# EAGLE board 13726_CSS811_BME280_Breakout_panel_V10 (EAGLE 7.5.0), part 1 of 5
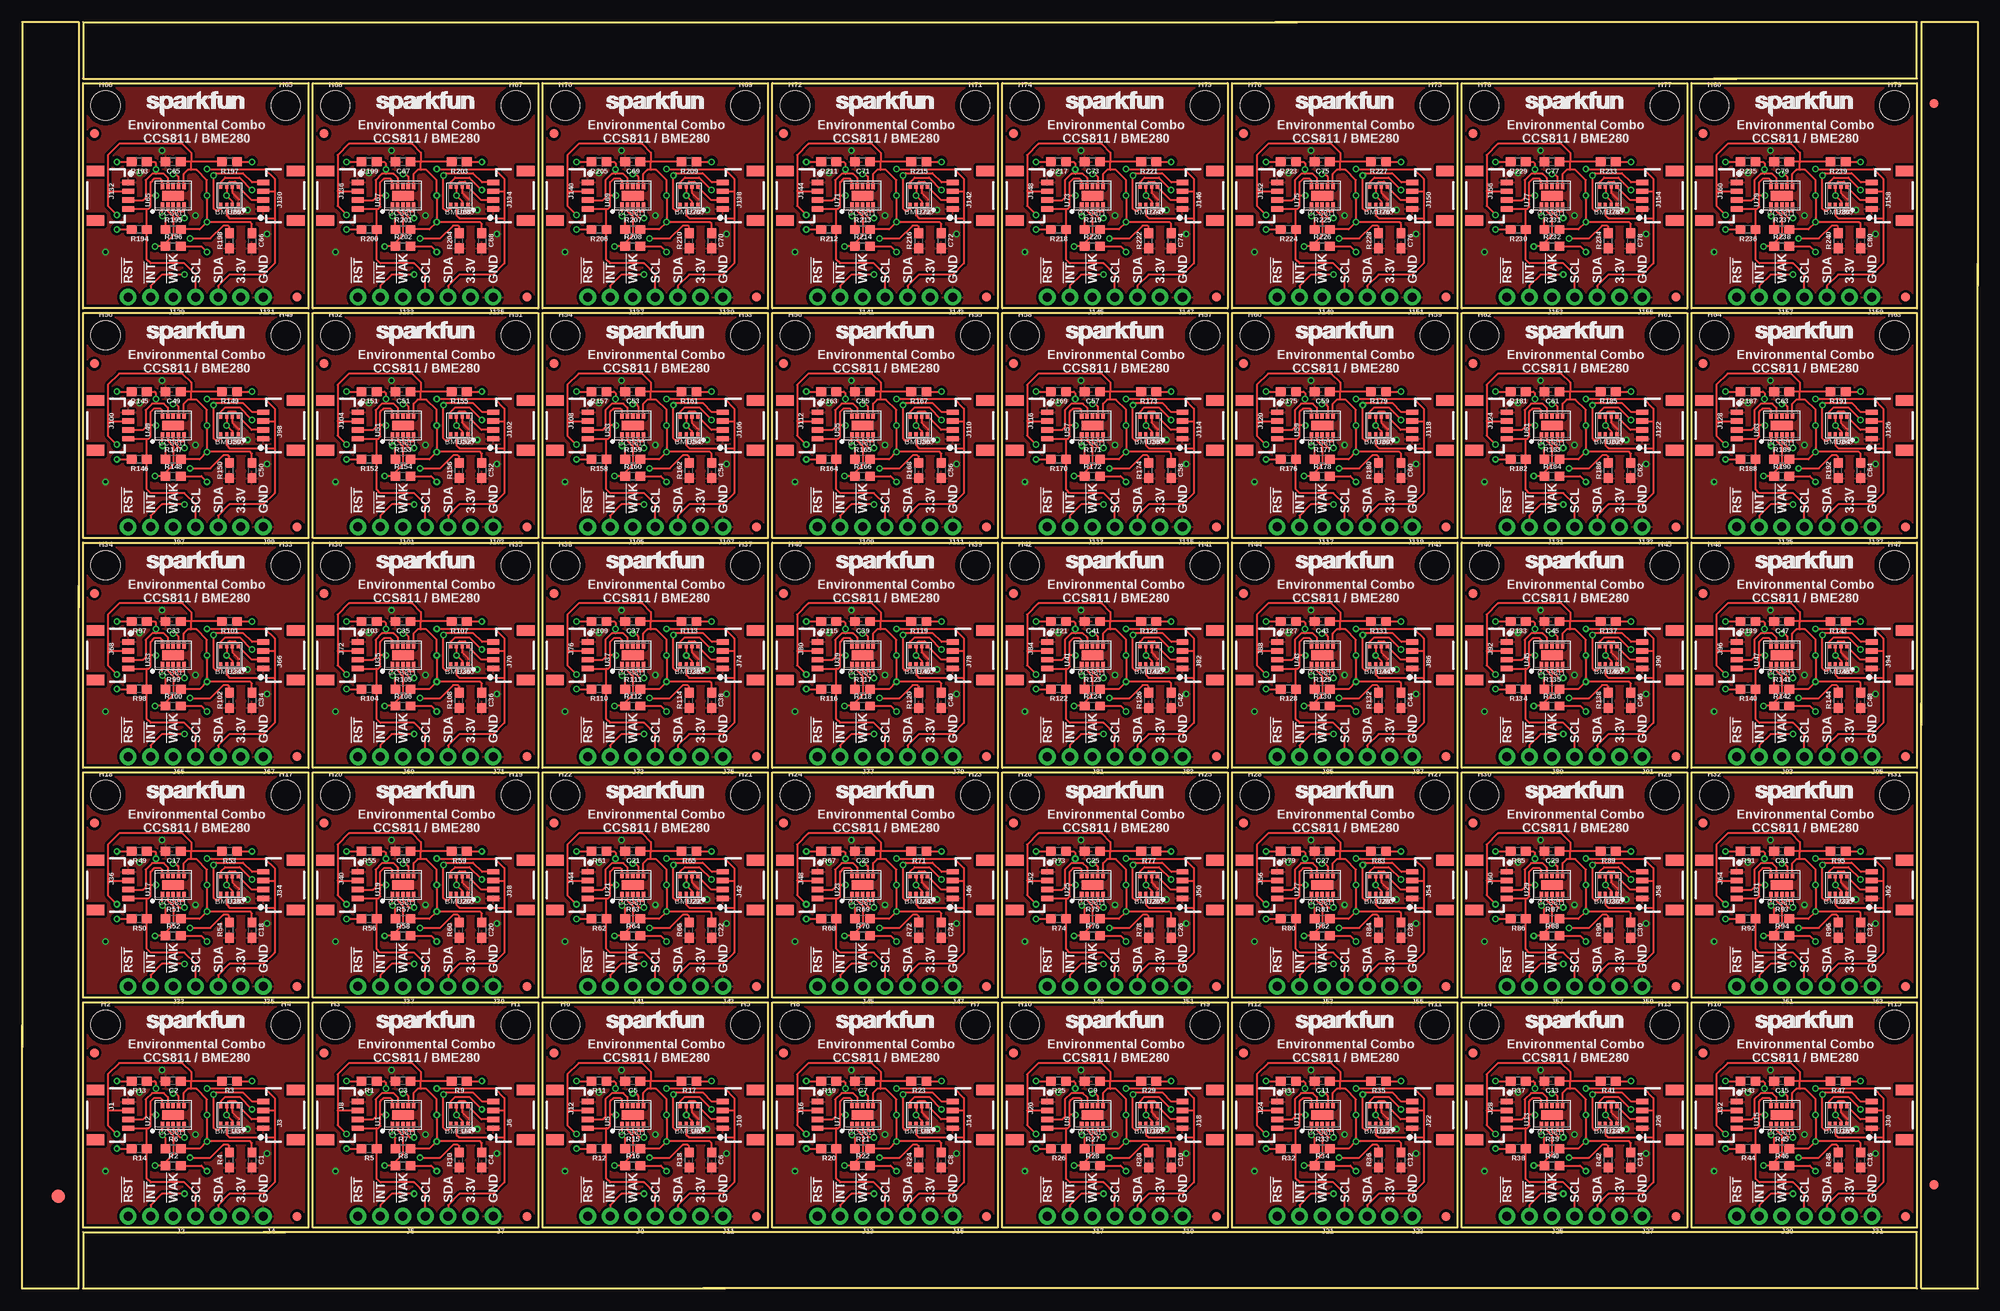
[diagram p0: board, top side]
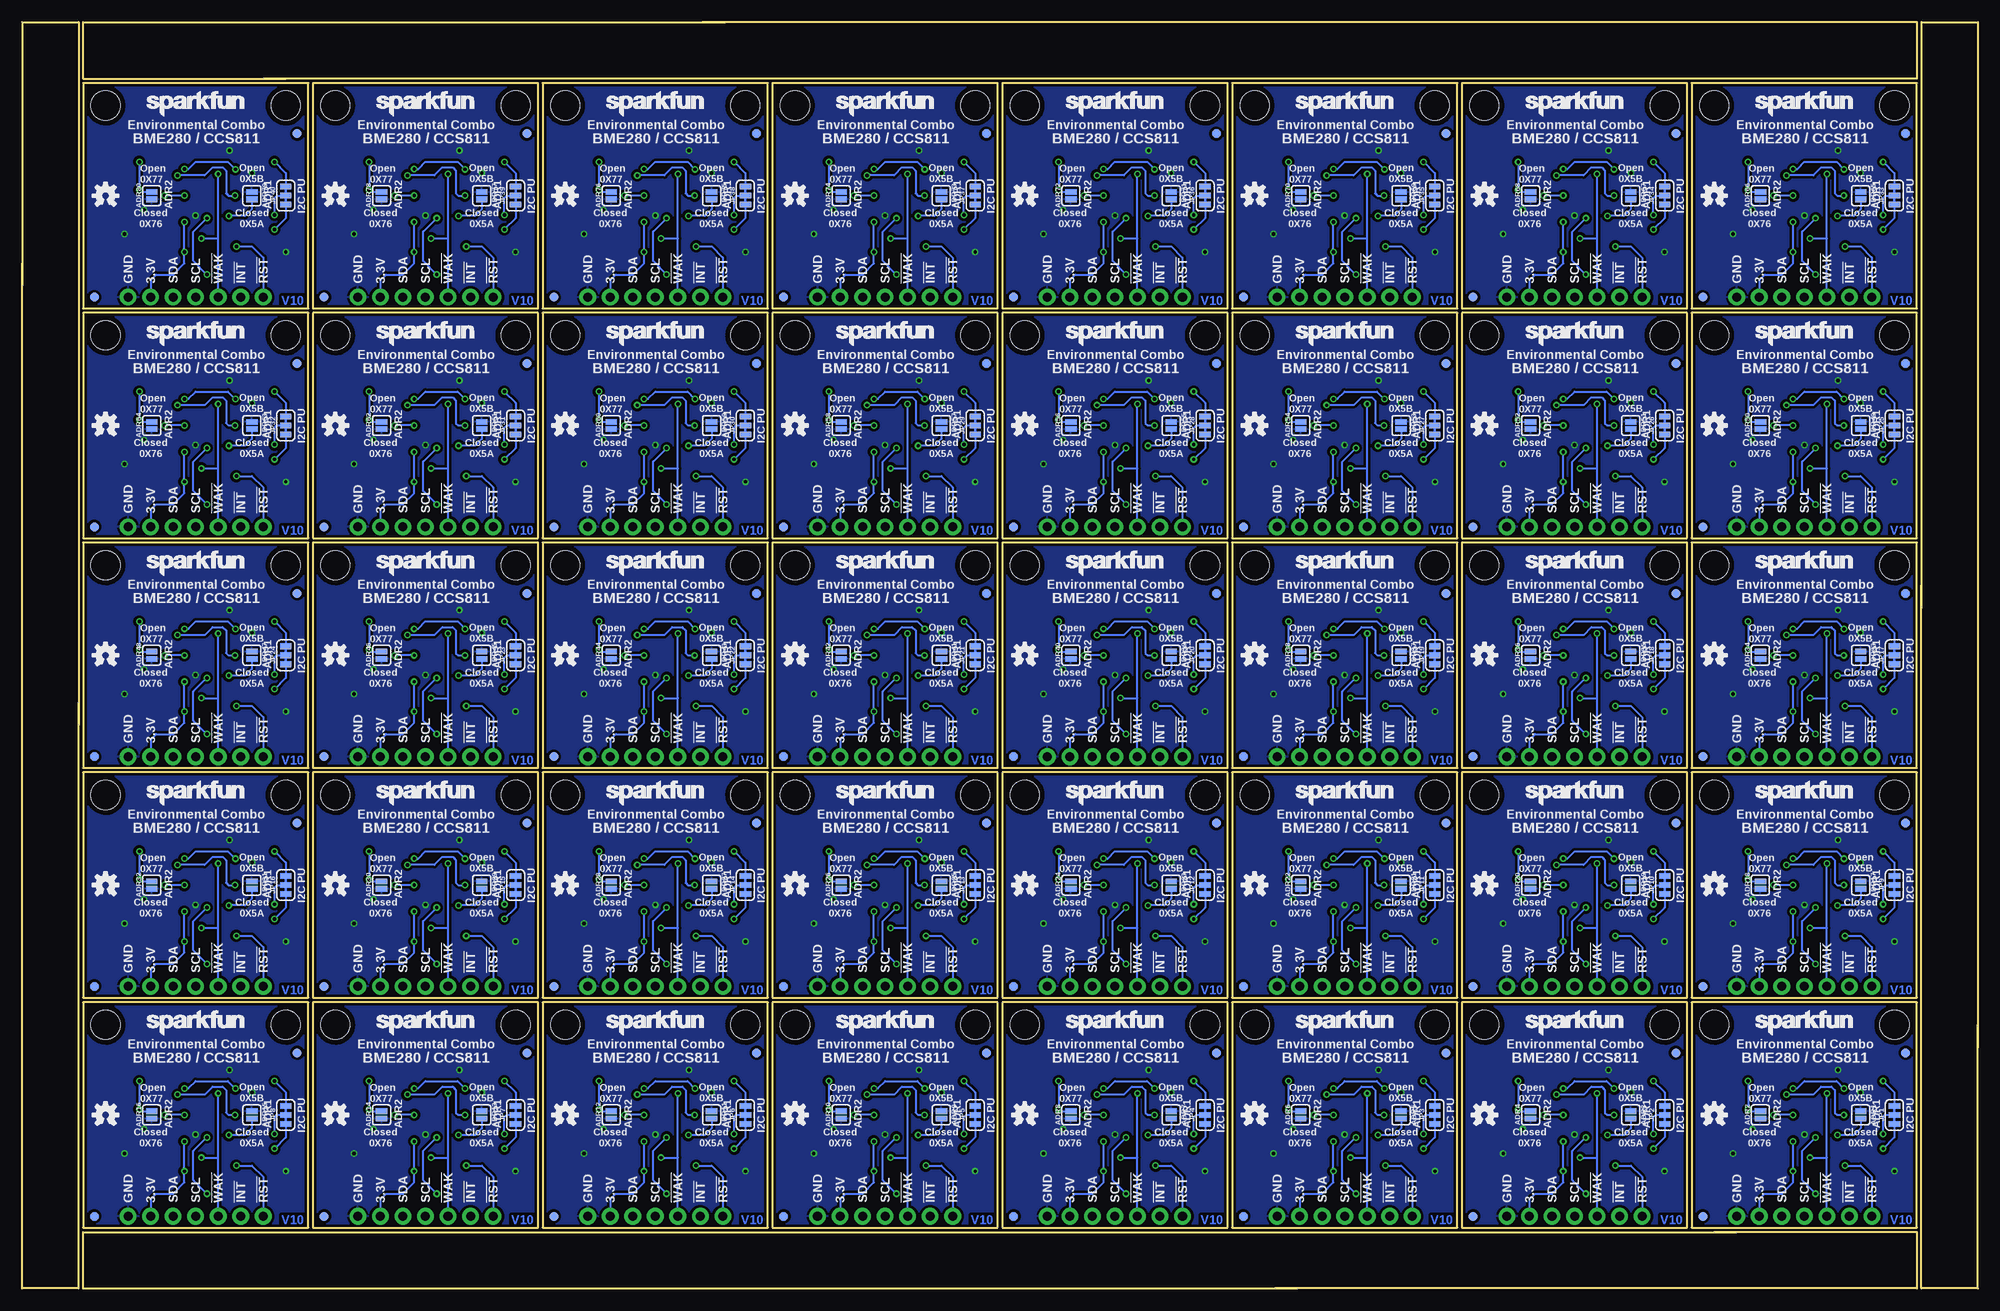
[diagram p1: board, bottom side, seen from below]

Size 220.47 x 142.75 mm. Coordinates in mm from the lower left corner, seen from the top.
Outline: 184 segments
Copper layers (1*16): Top 0.035mm / dielectric 1.5mm / Bottom 0.035mm
Design rules "SparkFun-2-layer-TIGHT": minimum track width 7mil, minimum drill 15mil, track to track 7mil, track to pad 7mil, pad to pad 7mil, via to via 7mil, smd to smd 7mil, copper to edge 7mil, drill to drill 7mil, minimum pad ring 7mil, minimum via ring 7mil, stop-mask expansion 4mil, vias tented up to drill 25mil, thermal gap 10mil

## Footprints (pad centres in the part's own frame; a part is rotated, then mirrored left to right if it is on the bottom)
SMT-JUMPER_2_NO_SILK = smd 0.635 x 1.27: 1 -0.406,0; 2 0.406,0
0603 = smd 1.1 x 1: 1 -0.85,0; 2 0.85,0
FIDUCIAL-1.5X3 = smd 1.5 x 1.5: 1 0,0
FIDUCIAL-1X2 = smd 1 x 1: 1 0,0
STAND-OFF = hole 3.302: 0,0
1X04_1MM_RA = smd 0.6 x 1.35: 1 -1.5,0; 2 -0.5,0; 3 0.5,0; 4 1.5,0 | smd 1.2 x 2: NC1 2.8,-3.675; NC2 -2.8,-3.675
1X03_NO_SILK = drill 1.016 pad 1.88: 1 0,0; 2 2.54,0; 3 5.08,0
1X04_NO_SILK = drill 1.016 pad 1.88: 1 0,0; 2 2.54,0; 3 5.08,0; 4 7.62,0
SMT-JUMPER_3_2-NC_TRACE_SILK = smd 0.635 x 1.27: 1 -1.016,0; 2 0,0; 3 1.016,0
LGA10 = smd 0.7 x 0.4: 1 -1.1,1.2; 2 -1.1,0.6; 3 -1.1,0; 4 -1.1,-0.6; 5 -1.1,-1.2; 6 1.1,-1.2; 7 1.1,-0.6; 8 1.1,0; 9 1.1,0.6; 10 1.1,1.2 | smd 1.1 x 2.45: EP 0,0
LGA-8-2.5X2.5 = smd 0.35 x 0.5: 1 -0.975,1.025; 2 -0.325,1.025; 3 0.325,1.025; 4 0.975,1.025; 5 0.975,-1.025; 6 0.325,-1.025; 7 -0.325,-1.025; 8 -0.975,-1.025

## Placement (x,y rotation side)
ADR1  [SMT-JUMPER_2_NO_SILK]  13.21,19.56 270 bottom
ADR2  [SMT-JUMPER_2_NO_SILK]  24.51,19.56 90 bottom
ADR3  [SMT-JUMPER_2_NO_SILK]  39.12,19.56 270 bottom
ADR4  [SMT-JUMPER_2_NO_SILK]  50.42,19.56 90 bottom
ADR5  [SMT-JUMPER_2_NO_SILK]  65.02,19.56 270 bottom
ADR6  [SMT-JUMPER_2_NO_SILK]  76.33,19.56 90 bottom
ADR7  [SMT-JUMPER_2_NO_SILK]  90.93,19.56 270 bottom
ADR8  [SMT-JUMPER_2_NO_SILK]  102.23,19.56 90 bottom
ADR9  [SMT-JUMPER_2_NO_SILK]  116.84,19.56 270 bottom
ADR10  [SMT-JUMPER_2_NO_SILK]  128.14,19.56 90 bottom
ADR11  [SMT-JUMPER_2_NO_SILK]  142.75,19.56 270 bottom
ADR12  [SMT-JUMPER_2_NO_SILK]  154.05,19.56 90 bottom
ADR13  [SMT-JUMPER_2_NO_SILK]  168.66,19.56 270 bottom
ADR14  [SMT-JUMPER_2_NO_SILK]  179.96,19.56 90 bottom
ADR15  [SMT-JUMPER_2_NO_SILK]  194.56,19.56 270 bottom
ADR16  [SMT-JUMPER_2_NO_SILK]  205.87,19.56 90 bottom
ADR17  [SMT-JUMPER_2_NO_SILK]  13.21,45.47 270 bottom
ADR18  [SMT-JUMPER_2_NO_SILK]  24.51,45.47 90 bottom
ADR19  [SMT-JUMPER_2_NO_SILK]  39.12,45.47 270 bottom
ADR20  [SMT-JUMPER_2_NO_SILK]  50.42,45.47 90 bottom
ADR21  [SMT-JUMPER_2_NO_SILK]  65.02,45.47 270 bottom
ADR22  [SMT-JUMPER_2_NO_SILK]  76.33,45.47 90 bottom
ADR23  [SMT-JUMPER_2_NO_SILK]  90.93,45.47 270 bottom
ADR24  [SMT-JUMPER_2_NO_SILK]  102.23,45.47 90 bottom
ADR25  [SMT-JUMPER_2_NO_SILK]  116.84,45.47 270 bottom
ADR26  [SMT-JUMPER_2_NO_SILK]  128.14,45.47 90 bottom
ADR27  [SMT-JUMPER_2_NO_SILK]  142.75,45.47 270 bottom
ADR28  [SMT-JUMPER_2_NO_SILK]  154.05,45.47 90 bottom
ADR29  [SMT-JUMPER_2_NO_SILK]  168.66,45.47 270 bottom
ADR30  [SMT-JUMPER_2_NO_SILK]  179.96,45.47 90 bottom
ADR31  [SMT-JUMPER_2_NO_SILK]  194.56,45.47 270 bottom
ADR32  [SMT-JUMPER_2_NO_SILK]  205.87,45.47 90 bottom
ADR33  [SMT-JUMPER_2_NO_SILK]  13.21,71.37 270 bottom
ADR34  [SMT-JUMPER_2_NO_SILK]  24.51,71.37 90 bottom
ADR35  [SMT-JUMPER_2_NO_SILK]  39.12,71.37 270 bottom
ADR36  [SMT-JUMPER_2_NO_SILK]  50.42,71.37 90 bottom
ADR37  [SMT-JUMPER_2_NO_SILK]  65.02,71.37 270 bottom
ADR38  [SMT-JUMPER_2_NO_SILK]  76.33,71.37 90 bottom
ADR39  [SMT-JUMPER_2_NO_SILK]  90.93,71.37 270 bottom
ADR40  [SMT-JUMPER_2_NO_SILK]  102.23,71.37 90 bottom
ADR41  [SMT-JUMPER_2_NO_SILK]  116.84,71.37 270 bottom
ADR42  [SMT-JUMPER_2_NO_SILK]  128.14,71.37 90 bottom
ADR43  [SMT-JUMPER_2_NO_SILK]  142.75,71.37 270 bottom
ADR44  [SMT-JUMPER_2_NO_SILK]  154.05,71.37 90 bottom
ADR45  [SMT-JUMPER_2_NO_SILK]  168.66,71.37 270 bottom
ADR46  [SMT-JUMPER_2_NO_SILK]  179.96,71.37 90 bottom
ADR47  [SMT-JUMPER_2_NO_SILK]  194.56,71.37 270 bottom
ADR48  [SMT-JUMPER_2_NO_SILK]  205.87,71.37 90 bottom
ADR49  [SMT-JUMPER_2_NO_SILK]  13.21,97.28 270 bottom
ADR50  [SMT-JUMPER_2_NO_SILK]  24.51,97.28 90 bottom
ADR51  [SMT-JUMPER_2_NO_SILK]  39.12,97.28 270 bottom
ADR52  [SMT-JUMPER_2_NO_SILK]  50.42,97.28 90 bottom
ADR53  [SMT-JUMPER_2_NO_SILK]  65.02,97.28 270 bottom
ADR54  [SMT-JUMPER_2_NO_SILK]  76.33,97.28 90 bottom
ADR55  [SMT-JUMPER_2_NO_SILK]  90.93,97.28 270 bottom
ADR56  [SMT-JUMPER_2_NO_SILK]  102.23,97.28 90 bottom
ADR57  [SMT-JUMPER_2_NO_SILK]  116.84,97.28 270 bottom
ADR58  [SMT-JUMPER_2_NO_SILK]  128.14,97.28 90 bottom
ADR59  [SMT-JUMPER_2_NO_SILK]  142.75,97.28 270 bottom
ADR60  [SMT-JUMPER_2_NO_SILK]  154.05,97.28 90 bottom
ADR61  [SMT-JUMPER_2_NO_SILK]  168.66,97.28 270 bottom
ADR62  [SMT-JUMPER_2_NO_SILK]  179.96,97.28 90 bottom
ADR63  [SMT-JUMPER_2_NO_SILK]  194.56,97.28 270 bottom
ADR64  [SMT-JUMPER_2_NO_SILK]  205.87,97.28 90 bottom
ADR65  [SMT-JUMPER_2_NO_SILK]  13.21,123.19 270 bottom
ADR66  [SMT-JUMPER_2_NO_SILK]  24.51,123.19 90 bottom
ADR67  [SMT-JUMPER_2_NO_SILK]  39.12,123.19 270 bottom
ADR68  [SMT-JUMPER_2_NO_SILK]  50.42,123.19 90 bottom
ADR69  [SMT-JUMPER_2_NO_SILK]  65.02,123.19 270 bottom
ADR70  [SMT-JUMPER_2_NO_SILK]  76.33,123.19 90 bottom
ADR71  [SMT-JUMPER_2_NO_SILK]  90.93,123.19 270 bottom
ADR72  [SMT-JUMPER_2_NO_SILK]  102.23,123.19 90 bottom
ADR73  [SMT-JUMPER_2_NO_SILK]  116.84,123.19 270 bottom
ADR74  [SMT-JUMPER_2_NO_SILK]  128.14,123.19 90 bottom
ADR75  [SMT-JUMPER_2_NO_SILK]  142.75,123.19 270 bottom
ADR76  [SMT-JUMPER_2_NO_SILK]  154.05,123.19 90 bottom
ADR77  [SMT-JUMPER_2_NO_SILK]  168.66,123.19 270 bottom
ADR78  [SMT-JUMPER_2_NO_SILK]  179.96,123.19 90 bottom
ADR79  [SMT-JUMPER_2_NO_SILK]  194.56,123.19 270 bottom
ADR80  [SMT-JUMPER_2_NO_SILK]  205.87,123.19 90 bottom
C1  0.1uF  [0603]  25.91,14.48 270 top
C2  1.0uF  [0603]  17.02,23.37 180 top
C3  1.0uF  [0603]  42.93,23.37 180 top
C4  0.1uF  [0603]  51.82,14.48 270 top
C5  1.0uF  [0603]  68.83,23.37 180 top
C6  0.1uF  [0603]  77.72,14.48 270 top
C7  1.0uF  [0603]  94.74,23.37 180 top
C8  0.1uF  [0603]  103.63,14.48 270 top
C9  1.0uF  [0603]  120.65,23.37 180 top
C10  0.1uF  [0603]  129.54,14.48 270 top
C11  1.0uF  [0603]  146.56,23.37 180 top
C12  0.1uF  [0603]  155.45,14.48 270 top
C13  1.0uF  [0603]  172.47,23.37 180 top
C14  0.1uF  [0603]  181.36,14.48 270 top
C15  1.0uF  [0603]  198.37,23.37 180 top
C16  0.1uF  [0603]  207.26,14.48 270 top
C17  1.0uF  [0603]  17.02,49.28 180 top
C18  0.1uF  [0603]  25.91,40.39 270 top
C19  1.0uF  [0603]  42.93,49.28 180 top
C20  0.1uF  [0603]  51.82,40.39 270 top
C21  1.0uF  [0603]  68.83,49.28 180 top
C22  0.1uF  [0603]  77.72,40.39 270 top
C23  1.0uF  [0603]  94.74,49.28 180 top
C24  0.1uF  [0603]  103.63,40.39 270 top
C25  1.0uF  [0603]  120.65,49.28 180 top
C26  0.1uF  [0603]  129.54,40.39 270 top
C27  1.0uF  [0603]  146.56,49.28 180 top
C28  0.1uF  [0603]  155.45,40.39 270 top
C29  1.0uF  [0603]  172.47,49.28 180 top
C30  0.1uF  [0603]  181.36,40.39 270 top
C31  1.0uF  [0603]  198.37,49.28 180 top
C32  0.1uF  [0603]  207.26,40.39 270 top
C33  1.0uF  [0603]  17.02,75.18 180 top
C34  0.1uF  [0603]  25.91,66.29 270 top
C35  1.0uF  [0603]  42.93,75.18 180 top
C36  0.1uF  [0603]  51.82,66.29 270 top
C37  1.0uF  [0603]  68.83,75.18 180 top
C38  0.1uF  [0603]  77.72,66.29 270 top
C39  1.0uF  [0603]  94.74,75.18 180 top
C40  0.1uF  [0603]  103.63,66.29 270 top
C41  1.0uF  [0603]  120.65,75.18 180 top
C42  0.1uF  [0603]  129.54,66.29 270 top
C43  1.0uF  [0603]  146.56,75.18 180 top
C44  0.1uF  [0603]  155.45,66.29 270 top
C45  1.0uF  [0603]  172.47,75.18 180 top
C46  0.1uF  [0603]  181.36,66.29 270 top
C47  1.0uF  [0603]  198.37,75.18 180 top
C48  0.1uF  [0603]  207.26,66.29 270 top
C49  1.0uF  [0603]  17.02,101.09 180 top
C50  0.1uF  [0603]  25.91,92.2 270 top
C51  1.0uF  [0603]  42.93,101.09 180 top
C52  0.1uF  [0603]  51.82,92.2 270 top
C53  1.0uF  [0603]  68.83,101.09 180 top
C54  0.1uF  [0603]  77.72,92.2 270 top
C55  1.0uF  [0603]  94.74,101.09 180 top
C56  0.1uF  [0603]  103.63,92.2 270 top
C57  1.0uF  [0603]  120.65,101.09 180 top
C58  0.1uF  [0603]  129.54,92.2 270 top
C59  1.0uF  [0603]  146.56,101.09 180 top
C60  0.1uF  [0603]  155.45,92.2 270 top
C61  1.0uF  [0603]  172.47,101.09 180 top
C62  0.1uF  [0603]  181.36,92.2 270 top
C63  1.0uF  [0603]  198.37,101.09 180 top
C64  0.1uF  [0603]  207.26,92.2 270 top
C65  1.0uF  [0603]  17.02,127 180 top
C66  0.1uF  [0603]  25.91,118.11 270 top
C67  1.0uF  [0603]  42.93,127 180 top
C68  0.1uF  [0603]  51.82,118.11 270 top
C69  1.0uF  [0603]  68.83,127 180 top
C70  0.1uF  [0603]  77.72,118.11 270 top
C71  1.0uF  [0603]  94.74,127 180 top
C72  0.1uF  [0603]  103.63,118.11 270 top
C73  1.0uF  [0603]  120.65,127 180 top
C74  0.1uF  [0603]  129.54,118.11 270 top
C75  1.0uF  [0603]  146.56,127 180 top
C76  0.1uF  [0603]  155.45,118.11 270 top
C77  1.0uF  [0603]  172.47,127 180 top
C78  0.1uF  [0603]  181.36,118.11 270 top
C79  1.0uF  [0603]  198.37,127 180 top
C80  0.1uF  [0603]  207.26,118.11 270 top
E$1  [FIDUCIAL-1.5X3]  4.06,10.41 0 top
E$7  [FIDUCIAL-1X2]  215.52,133.6 180 top
E$8  [FIDUCIAL-1X2]  215.52,11.68 0 top
FD1  FIDUCIAL1X2  [FIDUCIAL-1X2]  8.13,26.54 0 top
FD2  FIDUCIAL1X2  [FIDUCIAL-1X2]  30.99,8.13 0 top
FD3  FIDUCIAL1X2  [FIDUCIAL-1X2]  30.99,8.13 0 bottom
FD4  FIDUCIAL1X2  [FIDUCIAL-1X2]  8.13,26.54 0 bottom
FD5  FIDUCIAL1X2  [FIDUCIAL-1X2]  34.04,26.54 0 top
FD6  FIDUCIAL1X2  [FIDUCIAL-1X2]  56.9,8.13 0 top
FD7  FIDUCIAL1X2  [FIDUCIAL-1X2]  56.9,8.13 0 bottom
FD8  FIDUCIAL1X2  [FIDUCIAL-1X2]  34.04,26.54 0 bottom
FD9  FIDUCIAL1X2  [FIDUCIAL-1X2]  59.94,26.54 0 top
FD10  FIDUCIAL1X2  [FIDUCIAL-1X2]  82.8,8.13 0 top
FD11  FIDUCIAL1X2  [FIDUCIAL-1X2]  82.8,8.13 0 bottom
FD12  FIDUCIAL1X2  [FIDUCIAL-1X2]  59.94,26.54 0 bottom
FD13  FIDUCIAL1X2  [FIDUCIAL-1X2]  85.85,26.54 0 top
FD14  FIDUCIAL1X2  [FIDUCIAL-1X2]  108.71,8.13 0 top
FD15  FIDUCIAL1X2  [FIDUCIAL-1X2]  108.71,8.13 0 bottom
FD16  FIDUCIAL1X2  [FIDUCIAL-1X2]  85.85,26.54 0 bottom
FD17  FIDUCIAL1X2  [FIDUCIAL-1X2]  111.76,26.54 0 top
FD18  FIDUCIAL1X2  [FIDUCIAL-1X2]  134.62,8.13 0 top
FD19  FIDUCIAL1X2  [FIDUCIAL-1X2]  134.62,8.13 0 bottom
FD20  FIDUCIAL1X2  [FIDUCIAL-1X2]  111.76,26.54 0 bottom
FD21  FIDUCIAL1X2  [FIDUCIAL-1X2]  137.67,26.54 0 top
FD22  FIDUCIAL1X2  [FIDUCIAL-1X2]  160.53,8.13 0 top
FD23  FIDUCIAL1X2  [FIDUCIAL-1X2]  160.53,8.13 0 bottom
FD24  FIDUCIAL1X2  [FIDUCIAL-1X2]  137.67,26.54 0 bottom
FD25  FIDUCIAL1X2  [FIDUCIAL-1X2]  163.58,26.54 0 top
FD26  FIDUCIAL1X2  [FIDUCIAL-1X2]  186.44,8.13 0 top
FD27  FIDUCIAL1X2  [FIDUCIAL-1X2]  186.44,8.13 0 bottom
FD28  FIDUCIAL1X2  [FIDUCIAL-1X2]  163.58,26.54 0 bottom
FD29  FIDUCIAL1X2  [FIDUCIAL-1X2]  189.48,26.54 0 top
FD30  FIDUCIAL1X2  [FIDUCIAL-1X2]  212.34,8.13 0 top
FD31  FIDUCIAL1X2  [FIDUCIAL-1X2]  212.34,8.13 0 bottom
FD32  FIDUCIAL1X2  [FIDUCIAL-1X2]  189.48,26.54 0 bottom
FD33  FIDUCIAL1X2  [FIDUCIAL-1X2]  8.13,52.45 0 top
FD34  FIDUCIAL1X2  [FIDUCIAL-1X2]  30.99,34.04 0 top
FD35  FIDUCIAL1X2  [FIDUCIAL-1X2]  30.99,34.04 0 bottom
FD36  FIDUCIAL1X2  [FIDUCIAL-1X2]  8.13,52.45 0 bottom
FD37  FIDUCIAL1X2  [FIDUCIAL-1X2]  34.04,52.45 0 top
FD38  FIDUCIAL1X2  [FIDUCIAL-1X2]  56.9,34.04 0 top
FD39  FIDUCIAL1X2  [FIDUCIAL-1X2]  56.9,34.04 0 bottom
FD40  FIDUCIAL1X2  [FIDUCIAL-1X2]  34.04,52.45 0 bottom
FD41  FIDUCIAL1X2  [FIDUCIAL-1X2]  59.94,52.45 0 top
FD42  FIDUCIAL1X2  [FIDUCIAL-1X2]  82.8,34.04 0 top
FD43  FIDUCIAL1X2  [FIDUCIAL-1X2]  82.8,34.04 0 bottom
FD44  FIDUCIAL1X2  [FIDUCIAL-1X2]  59.94,52.45 0 bottom
FD45  FIDUCIAL1X2  [FIDUCIAL-1X2]  85.85,52.45 0 top
FD46  FIDUCIAL1X2  [FIDUCIAL-1X2]  108.71,34.04 0 top
FD47  FIDUCIAL1X2  [FIDUCIAL-1X2]  108.71,34.04 0 bottom
FD48  FIDUCIAL1X2  [FIDUCIAL-1X2]  85.85,52.45 0 bottom
FD49  FIDUCIAL1X2  [FIDUCIAL-1X2]  111.76,52.45 0 top
FD50  FIDUCIAL1X2  [FIDUCIAL-1X2]  134.62,34.04 0 top
FD51  FIDUCIAL1X2  [FIDUCIAL-1X2]  134.62,34.04 0 bottom
FD52  FIDUCIAL1X2  [FIDUCIAL-1X2]  111.76,52.45 0 bottom
FD53  FIDUCIAL1X2  [FIDUCIAL-1X2]  137.67,52.45 0 top
FD54  FIDUCIAL1X2  [FIDUCIAL-1X2]  160.53,34.04 0 top
FD55  FIDUCIAL1X2  [FIDUCIAL-1X2]  160.53,34.04 0 bottom
FD56  FIDUCIAL1X2  [FIDUCIAL-1X2]  137.67,52.45 0 bottom
FD57  FIDUCIAL1X2  [FIDUCIAL-1X2]  163.58,52.45 0 top
FD58  FIDUCIAL1X2  [FIDUCIAL-1X2]  186.44,34.04 0 top
FD59  FIDUCIAL1X2  [FIDUCIAL-1X2]  186.44,34.04 0 bottom
FD60  FIDUCIAL1X2  [FIDUCIAL-1X2]  163.58,52.45 0 bottom
FD61  FIDUCIAL1X2  [FIDUCIAL-1X2]  189.48,52.45 0 top
FD62  FIDUCIAL1X2  [FIDUCIAL-1X2]  212.34,34.04 0 top
FD63  FIDUCIAL1X2  [FIDUCIAL-1X2]  212.34,34.04 0 bottom
FD64  FIDUCIAL1X2  [FIDUCIAL-1X2]  189.48,52.45 0 bottom
FD65  FIDUCIAL1X2  [FIDUCIAL-1X2]  8.13,78.36 0 top
FD66  FIDUCIAL1X2  [FIDUCIAL-1X2]  30.99,59.94 0 top
FD67  FIDUCIAL1X2  [FIDUCIAL-1X2]  30.99,59.94 0 bottom
FD68  FIDUCIAL1X2  [FIDUCIAL-1X2]  8.13,78.36 0 bottom
FD69  FIDUCIAL1X2  [FIDUCIAL-1X2]  34.04,78.36 0 top
FD70  FIDUCIAL1X2  [FIDUCIAL-1X2]  56.9,59.94 0 top
FD71  FIDUCIAL1X2  [FIDUCIAL-1X2]  56.9,59.94 0 bottom
FD72  FIDUCIAL1X2  [FIDUCIAL-1X2]  34.04,78.36 0 bottom
FD73  FIDUCIAL1X2  [FIDUCIAL-1X2]  59.94,78.36 0 top
FD74  FIDUCIAL1X2  [FIDUCIAL-1X2]  82.8,59.94 0 top
FD75  FIDUCIAL1X2  [FIDUCIAL-1X2]  82.8,59.94 0 bottom
FD76  FIDUCIAL1X2  [FIDUCIAL-1X2]  59.94,78.36 0 bottom
FD77  FIDUCIAL1X2  [FIDUCIAL-1X2]  85.85,78.36 0 top
FD78  FIDUCIAL1X2  [FIDUCIAL-1X2]  108.71,59.94 0 top
FD79  FIDUCIAL1X2  [FIDUCIAL-1X2]  108.71,59.94 0 bottom
FD80  FIDUCIAL1X2  [FIDUCIAL-1X2]  85.85,78.36 0 bottom
FD81  FIDUCIAL1X2  [FIDUCIAL-1X2]  111.76,78.36 0 top
FD82  FIDUCIAL1X2  [FIDUCIAL-1X2]  134.62,59.94 0 top
FD83  FIDUCIAL1X2  [FIDUCIAL-1X2]  134.62,59.94 0 bottom
FD84  FIDUCIAL1X2  [FIDUCIAL-1X2]  111.76,78.36 0 bottom
FD85  FIDUCIAL1X2  [FIDUCIAL-1X2]  137.67,78.36 0 top
FD86  FIDUCIAL1X2  [FIDUCIAL-1X2]  160.53,59.94 0 top
FD87  FIDUCIAL1X2  [FIDUCIAL-1X2]  160.53,59.94 0 bottom
FD88  FIDUCIAL1X2  [FIDUCIAL-1X2]  137.67,78.36 0 bottom
FD89  FIDUCIAL1X2  [FIDUCIAL-1X2]  163.58,78.36 0 top
FD90  FIDUCIAL1X2  [FIDUCIAL-1X2]  186.44,59.94 0 top
FD91  FIDUCIAL1X2  [FIDUCIAL-1X2]  186.44,59.94 0 bottom
FD92  FIDUCIAL1X2  [FIDUCIAL-1X2]  163.58,78.36 0 bottom
FD93  FIDUCIAL1X2  [FIDUCIAL-1X2]  189.48,78.36 0 top
FD94  FIDUCIAL1X2  [FIDUCIAL-1X2]  212.34,59.94 0 top
FD95  FIDUCIAL1X2  [FIDUCIAL-1X2]  212.34,59.94 0 bottom
FD96  FIDUCIAL1X2  [FIDUCIAL-1X2]  189.48,78.36 0 bottom
FD97  FIDUCIAL1X2  [FIDUCIAL-1X2]  8.13,104.27 0 top
FD98  FIDUCIAL1X2  [FIDUCIAL-1X2]  30.99,85.85 0 top
FD99  FIDUCIAL1X2  [FIDUCIAL-1X2]  30.99,85.85 0 bottom
FD100  FIDUCIAL1X2  [FIDUCIAL-1X2]  8.13,104.27 0 bottom
FD101  FIDUCIAL1X2  [FIDUCIAL-1X2]  34.04,104.27 0 top
FD102  FIDUCIAL1X2  [FIDUCIAL-1X2]  56.9,85.85 0 top
FD103  FIDUCIAL1X2  [FIDUCIAL-1X2]  56.9,85.85 0 bottom
FD104  FIDUCIAL1X2  [FIDUCIAL-1X2]  34.04,104.27 0 bottom
FD105  FIDUCIAL1X2  [FIDUCIAL-1X2]  59.94,104.27 0 top
FD106  FIDUCIAL1X2  [FIDUCIAL-1X2]  82.8,85.85 0 top
FD107  FIDUCIAL1X2  [FIDUCIAL-1X2]  82.8,85.85 0 bottom
FD108  FIDUCIAL1X2  [FIDUCIAL-1X2]  59.94,104.27 0 bottom
FD109  FIDUCIAL1X2  [FIDUCIAL-1X2]  85.85,104.27 0 top
FD110  FIDUCIAL1X2  [FIDUCIAL-1X2]  108.71,85.85 0 top
FD111  FIDUCIAL1X2  [FIDUCIAL-1X2]  108.71,85.85 0 bottom
FD112  FIDUCIAL1X2  [FIDUCIAL-1X2]  85.85,104.27 0 bottom
FD113  FIDUCIAL1X2  [FIDUCIAL-1X2]  111.76,104.27 0 top
FD114  FIDUCIAL1X2  [FIDUCIAL-1X2]  134.62,85.85 0 top
FD115  FIDUCIAL1X2  [FIDUCIAL-1X2]  134.62,85.85 0 bottom
FD116  FIDUCIAL1X2  [FIDUCIAL-1X2]  111.76,104.27 0 bottom
FD117  FIDUCIAL1X2  [FIDUCIAL-1X2]  137.67,104.27 0 top
FD118  FIDUCIAL1X2  [FIDUCIAL-1X2]  160.53,85.85 0 top
FD119  FIDUCIAL1X2  [FIDUCIAL-1X2]  160.53,85.85 0 bottom
FD120  FIDUCIAL1X2  [FIDUCIAL-1X2]  137.67,104.27 0 bottom
FD121  FIDUCIAL1X2  [FIDUCIAL-1X2]  163.58,104.27 0 top
FD122  FIDUCIAL1X2  [FIDUCIAL-1X2]  186.44,85.85 0 top
FD123  FIDUCIAL1X2  [FIDUCIAL-1X2]  186.44,85.85 0 bottom
FD124  FIDUCIAL1X2  [FIDUCIAL-1X2]  163.58,104.27 0 bottom
FD125  FIDUCIAL1X2  [FIDUCIAL-1X2]  189.48,104.27 0 top
FD126  FIDUCIAL1X2  [FIDUCIAL-1X2]  212.34,85.85 0 top
FD127  FIDUCIAL1X2  [FIDUCIAL-1X2]  212.34,85.85 0 bottom
FD128  FIDUCIAL1X2  [FIDUCIAL-1X2]  189.48,104.27 0 bottom
FD129  FIDUCIAL1X2  [FIDUCIAL-1X2]  8.13,130.18 0 top
FD130  FIDUCIAL1X2  [FIDUCIAL-1X2]  30.99,111.76 0 top
FD131  FIDUCIAL1X2  [FIDUCIAL-1X2]  30.99,111.76 0 bottom
FD132  FIDUCIAL1X2  [FIDUCIAL-1X2]  8.13,130.18 0 bottom
FD133  FIDUCIAL1X2  [FIDUCIAL-1X2]  34.04,130.18 0 top
FD134  FIDUCIAL1X2  [FIDUCIAL-1X2]  56.9,111.76 0 top
FD135  FIDUCIAL1X2  [FIDUCIAL-1X2]  56.9,111.76 0 bottom
FD136  FIDUCIAL1X2  [FIDUCIAL-1X2]  34.04,130.18 0 bottom
FD137  FIDUCIAL1X2  [FIDUCIAL-1X2]  59.94,130.18 0 top
FD138  FIDUCIAL1X2  [FIDUCIAL-1X2]  82.8,111.76 0 top
FD139  FIDUCIAL1X2  [FIDUCIAL-1X2]  82.8,111.76 0 bottom
FD140  FIDUCIAL1X2  [FIDUCIAL-1X2]  59.94,130.18 0 bottom
FD141  FIDUCIAL1X2  [FIDUCIAL-1X2]  85.85,130.18 0 top
FD142  FIDUCIAL1X2  [FIDUCIAL-1X2]  108.71,111.76 0 top
FD143  FIDUCIAL1X2  [FIDUCIAL-1X2]  108.71,111.76 0 bottom
FD144  FIDUCIAL1X2  [FIDUCIAL-1X2]  85.85,130.18 0 bottom
FD145  FIDUCIAL1X2  [FIDUCIAL-1X2]  111.76,130.18 0 top
FD146  FIDUCIAL1X2  [FIDUCIAL-1X2]  134.62,111.76 0 top
FD147  FIDUCIAL1X2  [FIDUCIAL-1X2]  134.62,111.76 0 bottom
FD148  FIDUCIAL1X2  [FIDUCIAL-1X2]  111.76,130.18 0 bottom
FD149  FIDUCIAL1X2  [FIDUCIAL-1X2]  137.67,130.18 0 top
FD150  FIDUCIAL1X2  [FIDUCIAL-1X2]  160.53,111.76 0 top
FD151  FIDUCIAL1X2  [FIDUCIAL-1X2]  160.53,111.76 0 bottom
FD152  FIDUCIAL1X2  [FIDUCIAL-1X2]  137.67,130.18 0 bottom
FD153  FIDUCIAL1X2  [FIDUCIAL-1X2]  163.58,130.18 0 top
FD154  FIDUCIAL1X2  [FIDUCIAL-1X2]  186.44,111.76 0 top
FD155  FIDUCIAL1X2  [FIDUCIAL-1X2]  186.44,111.76 0 bottom
FD156  FIDUCIAL1X2  [FIDUCIAL-1X2]  163.58,130.18 0 bottom
FD157  FIDUCIAL1X2  [FIDUCIAL-1X2]  189.48,130.18 0 top
FD158  FIDUCIAL1X2  [FIDUCIAL-1X2]  212.34,111.76 0 top
FD159  FIDUCIAL1X2  [FIDUCIAL-1X2]  212.34,111.76 0 bottom
FD160  FIDUCIAL1X2  [FIDUCIAL-1X2]  189.48,130.18 0 bottom
H1  STAND-OFF  [STAND-OFF]  55.63,29.72 0 top
H2  STAND-OFF  [STAND-OFF]  9.4,29.72 0 top
H3  STAND-OFF  [STAND-OFF]  35.31,29.72 0 top
H4  STAND-OFF  [STAND-OFF]  29.72,29.72 0 top
H5  STAND-OFF  [STAND-OFF]  81.53,29.72 0 top
H6  STAND-OFF  [STAND-OFF]  61.21,29.72 0 top
H7  STAND-OFF  [STAND-OFF]  107.44,29.72 0 top
H8  STAND-OFF  [STAND-OFF]  87.12,29.72 0 top
H9  STAND-OFF  [STAND-OFF]  133.35,29.72 0 top
H10  STAND-OFF  [STAND-OFF]  113.03,29.72 0 top
H11  STAND-OFF  [STAND-OFF]  159.26,29.72 0 top
H12  STAND-OFF  [STAND-OFF]  138.94,29.72 0 top
H13  STAND-OFF  [STAND-OFF]  185.17,29.72 0 top
H14  STAND-OFF  [STAND-OFF]  164.85,29.72 0 top
H15  STAND-OFF  [STAND-OFF]  211.07,29.72 0 top
H16  STAND-OFF  [STAND-OFF]  190.75,29.72 0 top
H17  STAND-OFF  [STAND-OFF]  29.72,55.63 0 top
H18  STAND-OFF  [STAND-OFF]  9.4,55.63 0 top
H19  STAND-OFF  [STAND-OFF]  55.63,55.63 0 top
H20  STAND-OFF  [STAND-OFF]  35.31,55.63 0 top
H21  STAND-OFF  [STAND-OFF]  81.53,55.63 0 top
H22  STAND-OFF  [STAND-OFF]  61.21,55.63 0 top
H23  STAND-OFF  [STAND-OFF]  107.44,55.63 0 top
H24  STAND-OFF  [STAND-OFF]  87.12,55.63 0 top
H25  STAND-OFF  [STAND-OFF]  133.35,55.63 0 top
H26  STAND-OFF  [STAND-OFF]  113.03,55.63 0 top
H27  STAND-OFF  [STAND-OFF]  159.26,55.63 0 top
H28  STAND-OFF  [STAND-OFF]  138.94,55.63 0 top
H29  STAND-OFF  [STAND-OFF]  185.17,55.63 0 top
H30  STAND-OFF  [STAND-OFF]  164.85,55.63 0 top
H31  STAND-OFF  [STAND-OFF]  211.07,55.63 0 top
H32  STAND-OFF  [STAND-OFF]  190.75,55.63 0 top
H33  STAND-OFF  [STAND-OFF]  29.72,81.53 0 top
H34  STAND-OFF  [STAND-OFF]  9.4,81.53 0 top
H35  STAND-OFF  [STAND-OFF]  55.63,81.53 0 top
H36  STAND-OFF  [STAND-OFF]  35.31,81.53 0 top
H37  STAND-OFF  [STAND-OFF]  81.53,81.53 0 top
H38  STAND-OFF  [STAND-OFF]  61.21,81.53 0 top
H39  STAND-OFF  [STAND-OFF]  107.44,81.53 0 top
H40  STAND-OFF  [STAND-OFF]  87.12,81.53 0 top
H41  STAND-OFF  [STAND-OFF]  133.35,81.53 0 top
H42  STAND-OFF  [STAND-OFF]  113.03,81.53 0 top
H43  STAND-OFF  [STAND-OFF]  159.26,81.53 0 top
H44  STAND-OFF  [STAND-OFF]  138.94,81.53 0 top
H45  STAND-OFF  [STAND-OFF]  185.17,81.53 0 top
H46  STAND-OFF  [STAND-OFF]  164.85,81.53 0 top
H47  STAND-OFF  [STAND-OFF]  211.07,81.53 0 top
H48  STAND-OFF  [STAND-OFF]  190.75,81.53 0 top
H49  STAND-OFF  [STAND-OFF]  29.72,107.44 0 top
H50  STAND-OFF  [STAND-OFF]  9.4,107.44 0 top
H51  STAND-OFF  [STAND-OFF]  55.63,107.44 0 top
H52  STAND-OFF  [STAND-OFF]  35.31,107.44 0 top
H53  STAND-OFF  [STAND-OFF]  81.53,107.44 0 top
H54  STAND-OFF  [STAND-OFF]  61.21,107.44 0 top
H55  STAND-OFF  [STAND-OFF]  107.44,107.44 0 top
H56  STAND-OFF  [STAND-OFF]  87.12,107.44 0 top
H57  STAND-OFF  [STAND-OFF]  133.35,107.44 0 top
H58  STAND-OFF  [STAND-OFF]  113.03,107.44 0 top
H59  STAND-OFF  [STAND-OFF]  159.26,107.44 0 top
H60  STAND-OFF  [STAND-OFF]  138.94,107.44 0 top
H61  STAND-OFF  [STAND-OFF]  185.17,107.44 0 top
H62  STAND-OFF  [STAND-OFF]  164.85,107.44 0 top
H63  STAND-OFF  [STAND-OFF]  211.07,107.44 0 top
H64  STAND-OFF  [STAND-OFF]  190.75,107.44 0 top
H65  STAND-OFF  [STAND-OFF]  29.72,133.35 0 top
H66  STAND-OFF  [STAND-OFF]  9.4,133.35 0 top
H67  STAND-OFF  [STAND-OFF]  55.63,133.35 0 top
H68  STAND-OFF  [STAND-OFF]  35.31,133.35 0 top
H69  STAND-OFF  [STAND-OFF]  81.53,133.35 0 top
H70  STAND-OFF  [STAND-OFF]  61.21,133.35 0 top
H71  STAND-OFF  [STAND-OFF]  107.44,133.35 0 top
H72  STAND-OFF  [STAND-OFF]  87.12,133.35 0 top
H73  STAND-OFF  [STAND-OFF]  133.35,133.35 0 top
H74  STAND-OFF  [STAND-OFF]  113.03,133.35 0 top
H75  STAND-OFF  [STAND-OFF]  159.26,133.35 0 top
H76  STAND-OFF  [STAND-OFF]  138.94,133.35 0 top
H77  STAND-OFF  [STAND-OFF]  185.17,133.35 0 top
H78  STAND-OFF  [STAND-OFF]  164.85,133.35 0 top
H79  STAND-OFF  [STAND-OFF]  211.07,133.35 0 top
H80  STAND-OFF  [STAND-OFF]  190.75,133.35 0 top
J1  Qwiic Right Angle  [1X04_1MM_RA]  11.94,19.56 270 top
J2  CCS811 Options  [1X03_NO_SILK]  17.02,8.13 180 top
J3  Qwiic Right Angle  [1X04_1MM_RA]  27.18,19.56 90 top
J4  PTH  [1X04_NO_SILK]  27.18,8.13 180 top
J5  CCS811 Options  [1X03_NO_SILK]  42.93,8.13 180 top
J6  Qwiic Right Angle  [1X04_1MM_RA]  53.09,19.56 90 top
J7  PTH  [1X04_NO_SILK]  53.09,8.13 180 top
J8  Qwiic Right Angle  [1X04_1MM_RA]  37.85,19.56 270 top
J9  CCS811 Options  [1X03_NO_SILK]  68.83,8.13 180 top
J10  Qwiic Right Angle  [1X04_1MM_RA]  78.99,19.56 90 top
J11  PTH  [1X04_NO_SILK]  78.99,8.13 180 top
J12  Qwiic Right Angle  [1X04_1MM_RA]  63.75,19.56 270 top
J13  CCS811 Options  [1X03_NO_SILK]  94.74,8.13 180 top
J14  Qwiic Right Angle  [1X04_1MM_RA]  104.9,19.56 90 top
J15  PTH  [1X04_NO_SILK]  104.9,8.13 180 top
J16  Qwiic Right Angle  [1X04_1MM_RA]  89.66,19.56 270 top
J17  CCS811 Options  [1X03_NO_SILK]  120.65,8.13 180 top
J18  Qwiic Right Angle  [1X04_1MM_RA]  130.81,19.56 90 top
J19  PTH  [1X04_NO_SILK]  130.81,8.13 180 top
J20  Qwiic Right Angle  [1X04_1MM_RA]  115.57,19.56 270 top
J21  CCS811 Options  [1X03_NO_SILK]  146.56,8.13 180 top
J22  Qwiic Right Angle  [1X04_1MM_RA]  156.72,19.56 90 top
J23  PTH  [1X04_NO_SILK]  156.72,8.13 180 top
J24  Qwiic Right Angle  [1X04_1MM_RA]  141.48,19.56 270 top
J25  CCS811 Options  [1X03_NO_SILK]  172.47,8.13 180 top
J26  Qwiic Right Angle  [1X04_1MM_RA]  182.63,19.56 90 top
J27  PTH  [1X04_NO_SILK]  182.63,8.13 180 top
J28  Qwiic Right Angle  [1X04_1MM_RA]  167.39,19.56 270 top
J29  CCS811 Options  [1X03_NO_SILK]  198.37,8.13 180 top
J30  Qwiic Right Angle  [1X04_1MM_RA]  208.53,19.56 90 top
J31  PTH  [1X04_NO_SILK]  208.53,8.13 180 top
J32  Qwiic Right Angle  [1X04_1MM_RA]  193.29,19.56 270 top
J33  CCS811 Options  [1X03_NO_SILK]  17.02,34.04 180 top
J34  Qwiic Right Angle  [1X04_1MM_RA]  27.18,45.47 90 top
J35  PTH  [1X04_NO_SILK]  27.18,34.04 180 top
J36  Qwiic Right Angle  [1X04_1MM_RA]  11.94,45.47 270 top
J37  CCS811 Options  [1X03_NO_SILK]  42.93,34.04 180 top
J38  Qwiic Right Angle  [1X04_1MM_RA]  53.09,45.47 90 top
J39  PTH  [1X04_NO_SILK]  53.09,34.04 180 top
J40  Qwiic Right Angle  [1X04_1MM_RA]  37.85,45.47 270 top
J41  CCS811 Options  [1X03_NO_SILK]  68.83,34.04 180 top
J42  Qwiic Right Angle  [1X04_1MM_RA]  78.99,45.47 90 top
J43  PTH  [1X04_NO_SILK]  78.99,34.04 180 top
J44  Qwiic Right Angle  [1X04_1MM_RA]  63.75,45.47 270 top
J45  CCS811 Options  [1X03_NO_SILK]  94.74,34.04 180 top
J46  Qwiic Right Angle  [1X04_1MM_RA]  104.9,45.47 90 top
J47  PTH  [1X04_NO_SILK]  104.9,34.04 180 top
J48  Qwiic Right Angle  [1X04_1MM_RA]  89.66,45.47 270 top
J49  CCS811 Options  [1X03_NO_SILK]  120.65,34.04 180 top
J50  Qwiic Right Angle  [1X04_1MM_RA]  130.81,45.47 90 top
J51  PTH  [1X04_NO_SILK]  130.81,34.04 180 top
J52  Qwiic Right Angle  [1X04_1MM_RA]  115.57,45.47 270 top
J53  CCS811 Options  [1X03_NO_SILK]  146.56,34.04 180 top
J54  Qwiic Right Angle  [1X04_1MM_RA]  156.72,45.47 90 top
J55  PTH  [1X04_NO_SILK]  156.72,34.04 180 top
J56  Qwiic Right Angle  [1X04_1MM_RA]  141.48,45.47 270 top
J57  CCS811 Options  [1X03_NO_SILK]  172.47,34.04 180 top
J58  Qwiic Right Angle  [1X04_1MM_RA]  182.63,45.47 90 top
J59  PTH  [1X04_NO_SILK]  182.63,34.04 180 top
J60  Qwiic Right Angle  [1X04_1MM_RA]  167.39,45.47 270 top
J61  CCS811 Options  [1X03_NO_SILK]  198.37,34.04 180 top
J62  Qwiic Right Angle  [1X04_1MM_RA]  208.53,45.47 90 top
J63  PTH  [1X04_NO_SILK]  208.53,34.04 180 top
J64  Qwiic Right Angle  [1X04_1MM_RA]  193.29,45.47 270 top
J65  CCS811 Options  [1X03_NO_SILK]  17.02,59.94 180 top
J66  Qwiic Right Angle  [1X04_1MM_RA]  27.18,71.37 90 top
J67  PTH  [1X04_NO_SILK]  27.18,59.94 180 top
J68  Qwiic Right Angle  [1X04_1MM_RA]  11.94,71.37 270 top
J69  CCS811 Options  [1X03_NO_SILK]  42.93,59.94 180 top
J70  Qwiic Right Angle  [1X04_1MM_RA]  53.09,71.37 90 top
J71  PTH  [1X04_NO_SILK]  53.09,59.94 180 top
J72  Qwiic Right Angle  [1X04_1MM_RA]  37.85,71.37 270 top
J73  CCS811 Options  [1X03_NO_SILK]  68.83,59.94 180 top
J74  Qwiic Right Angle  [1X04_1MM_RA]  78.99,71.37 90 top
J75  PTH  [1X04_NO_SILK]  78.99,59.94 180 top
J76  Qwiic Right Angle  [1X04_1MM_RA]  63.75,71.37 270 top
J77  CCS811 Options  [1X03_NO_SILK]  94.74,59.94 180 top
J78  Qwiic Right Angle  [1X04_1MM_RA]  104.9,71.37 90 top
J79  PTH  [1X04_NO_SILK]  104.9,59.94 180 top
J80  Qwiic Right Angle  [1X04_1MM_RA]  89.66,71.37 270 top
J81  CCS811 Options  [1X03_NO_SILK]  120.65,59.94 180 top
J82  Qwiic Right Angle  [1X04_1MM_RA]  130.81,71.37 90 top
J83  PTH  [1X04_NO_SILK]  130.81,59.94 180 top
J84  Qwiic Right Angle  [1X04_1MM_RA]  115.57,71.37 270 top
J85  CCS811 Options  [1X03_NO_SILK]  146.56,59.94 180 top
J86  Qwiic Right Angle  [1X04_1MM_RA]  156.72,71.37 90 top
J87  PTH  [1X04_NO_SILK]  156.72,59.94 180 top
J88  Qwiic Right Angle  [1X04_1MM_RA]  141.48,71.37 270 top
J89  CCS811 Options  [1X03_NO_SILK]  172.47,59.94 180 top
J90  Qwiic Right Angle  [1X04_1MM_RA]  182.63,71.37 90 top
J91  PTH  [1X04_NO_SILK]  182.63,59.94 180 top
J92  Qwiic Right Angle  [1X04_1MM_RA]  167.39,71.37 270 top
J93  CCS811 Options  [1X03_NO_SILK]  198.37,59.94 180 top
J94  Qwiic Right Angle  [1X04_1MM_RA]  208.53,71.37 90 top
J95  PTH  [1X04_NO_SILK]  208.53,59.94 180 top
J96  Qwiic Right Angle  [1X04_1MM_RA]  193.29,71.37 270 top
J97  CCS811 Options  [1X03_NO_SILK]  17.02,85.85 180 top
J98  Qwiic Right Angle  [1X04_1MM_RA]  27.18,97.28 90 top
J99  PTH  [1X04_NO_SILK]  27.18,85.85 180 top
J100  Qwiic Right Angle  [1X04_1MM_RA]  11.94,97.28 270 top
J101  CCS811 Options  [1X03_NO_SILK]  42.93,85.85 180 top
J102  Qwiic Right Angle  [1X04_1MM_RA]  53.09,97.28 90 top
J103  PTH  [1X04_NO_SILK]  53.09,85.85 180 top
J104  Qwiic Right Angle  [1X04_1MM_RA]  37.85,97.28 270 top
J105  CCS811 Options  [1X03_NO_SILK]  68.83,85.85 180 top
J106  Qwiic Right Angle  [1X04_1MM_RA]  78.99,97.28 90 top
J107  PTH  [1X04_NO_SILK]  78.99,85.85 180 top
J108  Qwiic Right Angle  [1X04_1MM_RA]  63.75,97.28 270 top
J109  CCS811 Options  [1X03_NO_SILK]  94.74,85.85 180 top
J110  Qwiic Right Angle  [1X04_1MM_RA]  104.9,97.28 90 top
J111  PTH  [1X04_NO_SILK]  104.9,85.85 180 top
J112  Qwiic Right Angle  [1X04_1MM_RA]  89.66,97.28 270 top
J113  CCS811 Options  [1X03_NO_SILK]  120.65,85.85 180 top
J114  Qwiic Right Angle  [1X04_1MM_RA]  130.81,97.28 90 top
J115  PTH  [1X04_NO_SILK]  130.81,85.85 180 top
J116  Qwiic Right Angle  [1X04_1MM_RA]  115.57,97.28 270 top
J117  CCS811 Options  [1X03_NO_SILK]  146.56,85.85 180 top
J118  Qwiic Right Angle  [1X04_1MM_RA]  156.72,97.28 90 top
J119  PTH  [1X04_NO_SILK]  156.72,85.85 180 top
J120  Qwiic Right Angle  [1X04_1MM_RA]  141.48,97.28 270 top
J121  CCS811 Options  [1X03_NO_SILK]  172.47,85.85 180 top
J122  Qwiic Right Angle  [1X04_1MM_RA]  182.63,97.28 90 top
J123  PTH  [1X04_NO_SILK]  182.63,85.85 180 top
J124  Qwiic Right Angle  [1X04_1MM_RA]  167.39,97.28 270 top
J125  CCS811 Options  [1X03_NO_SILK]  198.37,85.85 180 top
J126  Qwiic Right Angle  [1X04_1MM_RA]  208.53,97.28 90 top
J127  PTH  [1X04_NO_SILK]  208.53,85.85 180 top
J128  Qwiic Right Angle  [1X04_1MM_RA]  193.29,97.28 270 top
J129  CCS811 Options  [1X03_NO_SILK]  17.02,111.76 180 top
J130  Qwiic Right Angle  [1X04_1MM_RA]  27.18,123.19 90 top
J131  PTH  [1X04_NO_SILK]  27.18,111.76 180 top
J132  Qwiic Right Angle  [1X04_1MM_RA]  11.94,123.19 270 top
J133  CCS811 Options  [1X03_NO_SILK]  42.93,111.76 180 top
J134  Qwiic Right Angle  [1X04_1MM_RA]  53.09,123.19 90 top
J135  PTH  [1X04_NO_SILK]  53.09,111.76 180 top
J136  Qwiic Right Angle  [1X04_1MM_RA]  37.85,123.19 270 top
J137  CCS811 Options  [1X03_NO_SILK]  68.83,111.76 180 top
J138  Qwiic Right Angle  [1X04_1MM_RA]  78.99,123.19 90 top
J139  PTH  [1X04_NO_SILK]  78.99,111.76 180 top
J140  Qwiic Right Angle  [1X04_1MM_RA]  63.75,123.19 270 top
J141  CCS811 Options  [1X03_NO_SILK]  94.74,111.76 180 top
J142  Qwiic Right Angle  [1X04_1MM_RA]  104.9,123.19 90 top
J143  PTH  [1X04_NO_SILK]  104.9,111.76 180 top
J144  Qwiic Right Angle  [1X04_1MM_RA]  89.66,123.19 270 top
J145  CCS811 Options  [1X03_NO_SILK]  120.65,111.76 180 top
J146  Qwiic Right Angle  [1X04_1MM_RA]  130.81,123.19 90 top
J147  PTH  [1X04_NO_SILK]  130.81,111.76 180 top
J148  Qwiic Right Angle  [1X04_1MM_RA]  115.57,123.19 270 top
J149  CCS811 Options  [1X03_NO_SILK]  146.56,111.76 180 top
J150  Qwiic Right Angle  [1X04_1MM_RA]  156.72,123.19 90 top
J151  PTH  [1X04_NO_SILK]  156.72,111.76 180 top
J152  Qwiic Right Angle  [1X04_1MM_RA]  141.48,123.19 270 top
J153  CCS811 Options  [1X03_NO_SILK]  172.47,111.76 180 top
J154  Qwiic Right Angle  [1X04_1MM_RA]  182.63,123.19 90 top
J155  PTH  [1X04_NO_SILK]  182.63,111.76 180 top
J156  Qwiic Right Angle  [1X04_1MM_RA]  167.39,123.19 270 top
J157  CCS811 Options  [1X03_NO_SILK]  198.37,111.76 180 top
J158  Qwiic Right Angle  [1X04_1MM_RA]  208.53,123.19 90 top
J159  PTH  [1X04_NO_SILK]  208.53,111.76 180 top
J160  Qwiic Right Angle  [1X04_1MM_RA]  193.29,123.19 270 top
JP1  [SMT-JUMPER_3_2-NC_TRACE_SILK]  9.4,19.56 90 bottom
JP2  [SMT-JUMPER_3_2-NC_TRACE_SILK]  35.31,19.56 90 bottom
JP3  [SMT-JUMPER_3_2-NC_TRACE_SILK]  61.21,19.56 90 bottom
JP4  [SMT-JUMPER_3_2-NC_TRACE_SILK]  87.12,19.56 90 bottom
JP5  [SMT-JUMPER_3_2-NC_TRACE_SILK]  113.03,19.56 90 bottom
JP6  [SMT-JUMPER_3_2-NC_TRACE_SILK]  138.94,19.56 90 bottom
JP7  [SMT-JUMPER_3_2-NC_TRACE_SILK]  164.85,19.56 90 bottom
JP8  [SMT-JUMPER_3_2-NC_TRACE_SILK]  190.75,19.56 90 bottom
JP9  [SMT-JUMPER_3_2-NC_TRACE_SILK]  9.4,45.47 90 bottom
JP10  [SMT-JUMPER_3_2-NC_TRACE_SILK]  35.31,45.47 90 bottom
JP11  [SMT-JUMPER_3_2-NC_TRACE_SILK]  61.21,45.47 90 bottom
JP12  [SMT-JUMPER_3_2-NC_TRACE_SILK]  87.12,45.47 90 bottom
JP13  [SMT-JUMPER_3_2-NC_TRACE_SILK]  113.03,45.47 90 bottom
JP14  [SMT-JUMPER_3_2-NC_TRACE_SILK]  138.94,45.47 90 bottom
JP15  [SMT-JUMPER_3_2-NC_TRACE_SILK]  164.85,45.47 90 bottom
JP16  [SMT-JUMPER_3_2-NC_TRACE_SILK]  190.75,45.47 90 bottom
JP17  [SMT-JUMPER_3_2-NC_TRACE_SILK]  9.4,71.37 90 bottom
JP18  [SMT-JUMPER_3_2-NC_TRACE_SILK]  35.31,71.37 90 bottom
JP19  [SMT-JUMPER_3_2-NC_TRACE_SILK]  61.21,71.37 90 bottom
JP20  [SMT-JUMPER_3_2-NC_TRACE_SILK]  87.12,71.37 90 bottom
JP21  [SMT-JUMPER_3_2-NC_TRACE_SILK]  113.03,71.37 90 bottom
JP22  [SMT-JUMPER_3_2-NC_TRACE_SILK]  138.94,71.37 90 bottom
JP23  [SMT-JUMPER_3_2-NC_TRACE_SILK]  164.85,71.37 90 bottom
JP24  [SMT-JUMPER_3_2-NC_TRACE_SILK]  190.75,71.37 90 bottom
JP25  [SMT-JUMPER_3_2-NC_TRACE_SILK]  9.4,97.28 90 bottom
JP26  [SMT-JUMPER_3_2-NC_TRACE_SILK]  35.31,97.28 90 bottom
JP27  [SMT-JUMPER_3_2-NC_TRACE_SILK]  61.21,97.28 90 bottom
JP28  [SMT-JUMPER_3_2-NC_TRACE_SILK]  87.12,97.28 90 bottom
JP29  [SMT-JUMPER_3_2-NC_TRACE_SILK]  113.03,97.28 90 bottom
JP30  [SMT-JUMPER_3_2-NC_TRACE_SILK]  138.94,97.28 90 bottom
JP31  [SMT-JUMPER_3_2-NC_TRACE_SILK]  164.85,97.28 90 bottom
JP32  [SMT-JUMPER_3_2-NC_TRACE_SILK]  190.75,97.28 90 bottom
JP33  [SMT-JUMPER_3_2-NC_TRACE_SILK]  9.4,123.19 90 bottom
JP34  [SMT-JUMPER_3_2-NC_TRACE_SILK]  35.31,123.19 90 bottom
JP35  [SMT-JUMPER_3_2-NC_TRACE_SILK]  61.21,123.19 90 bottom
JP36  [SMT-JUMPER_3_2-NC_TRACE_SILK]  87.12,123.19 90 bottom
JP37  [SMT-JUMPER_3_2-NC_TRACE_SILK]  113.03,123.19 90 bottom
JP38  [SMT-JUMPER_3_2-NC_TRACE_SILK]  138.94,123.19 90 bottom
JP39  [SMT-JUMPER_3_2-NC_TRACE_SILK]  164.85,123.19 90 bottom
JP40  [SMT-JUMPER_3_2-NC_TRACE_SILK]  190.75,123.19 90 bottom
LOGO1  SFE_LOGO_NAME.1_INCH  [SFE_LOGO_NAME_.1]  13.59,28.04 0 top
LOGO2  OSHW-LOGOS  [OSHW-LOGO-S]  55.63,19.56 0 bottom
LOGO3  SFE_LOGO_NAME.1_INCH  [SFE_LOGO_NAME_.1]  25.53,28.04 0 bottom
LOGO4  OSHW-LOGOS  [OSHW-LOGO-S]  29.72,19.56 0 bottom
LOGO5  SFE_LOGO_NAME.1_INCH  [SFE_LOGO_NAME_.1]  39.5,28.04 0 top
LOGO6  SFE_LOGO_NAME.1_INCH  [SFE_LOGO_NAME_.1]  51.44,28.04 0 bottom
LOGO7  OSHW-LOGOS  [OSHW-LOGO-S]  81.53,19.56 0 bottom
LOGO8  SFE_LOGO_NAME.1_INCH  [SFE_LOGO_NAME_.1]  65.41,28.04 0 top
LOGO9  SFE_LOGO_NAME.1_INCH  [SFE_LOGO_NAME_.1]  77.34,28.04 0 bottom
LOGO10  OSHW-LOGOS  [OSHW-LOGO-S]  107.44,19.56 0 bottom
LOGO11  SFE_LOGO_NAME.1_INCH  [SFE_LOGO_NAME_.1]  91.31,28.04 0 top
LOGO12  SFE_LOGO_NAME.1_INCH  [SFE_LOGO_NAME_.1]  103.25,28.04 0 bottom
LOGO13  OSHW-LOGOS  [OSHW-LOGO-S]  133.35,19.56 0 bottom
LOGO14  SFE_LOGO_NAME.1_INCH  [SFE_LOGO_NAME_.1]  117.22,28.04 0 top
LOGO15  SFE_LOGO_NAME.1_INCH  [SFE_LOGO_NAME_.1]  129.16,28.04 0 bottom
LOGO16  OSHW-LOGOS  [OSHW-LOGO-S]  159.26,19.56 0 bottom
LOGO17  SFE_LOGO_NAME.1_INCH  [SFE_LOGO_NAME_.1]  143.13,28.04 0 top
LOGO18  SFE_LOGO_NAME.1_INCH  [SFE_LOGO_NAME_.1]  155.07,28.04 0 bottom
LOGO19  OSHW-LOGOS  [OSHW-LOGO-S]  185.17,19.56 0 bottom
LOGO20  SFE_LOGO_NAME.1_INCH  [SFE_LOGO_NAME_.1]  169.04,28.04 0 top
LOGO21  SFE_LOGO_NAME.1_INCH  [SFE_LOGO_NAME_.1]  180.97,28.04 0 bottom
LOGO22  OSHW-LOGOS  [OSHW-LOGO-S]  211.07,19.56 0 bottom
LOGO23  SFE_LOGO_NAME.1_INCH  [SFE_LOGO_NAME_.1]  194.94,28.04 0 top
LOGO24  SFE_LOGO_NAME.1_INCH  [SFE_LOGO_NAME_.1]  206.88,28.04 0 bottom
LOGO25  OSHW-LOGOS  [OSHW-LOGO-S]  29.72,45.47 0 bottom
LOGO26  SFE_LOGO_NAME.1_INCH  [SFE_LOGO_NAME_.1]  13.59,53.94 0 top
LOGO27  SFE_LOGO_NAME.1_INCH  [SFE_LOGO_NAME_.1]  25.53,53.94 0 bottom
LOGO28  OSHW-LOGOS  [OSHW-LOGO-S]  55.63,45.47 0 bottom
LOGO29  SFE_LOGO_NAME.1_INCH  [SFE_LOGO_NAME_.1]  39.5,53.94 0 top
LOGO30  SFE_LOGO_NAME.1_INCH  [SFE_LOGO_NAME_.1]  51.44,53.94 0 bottom
LOGO31  OSHW-LOGOS  [OSHW-LOGO-S]  81.53,45.47 0 bottom
LOGO32  SFE_LOGO_NAME.1_INCH  [SFE_LOGO_NAME_.1]  65.41,53.94 0 top
LOGO33  SFE_LOGO_NAME.1_INCH  [SFE_LOGO_NAME_.1]  77.34,53.94 0 bottom
LOGO34  OSHW-LOGOS  [OSHW-LOGO-S]  107.44,45.47 0 bottom
LOGO35  SFE_LOGO_NAME.1_INCH  [SFE_LOGO_NAME_.1]  91.31,53.94 0 top
LOGO36  SFE_LOGO_NAME.1_INCH  [SFE_LOGO_NAME_.1]  103.25,53.94 0 bottom
LOGO37  OSHW-LOGOS  [OSHW-LOGO-S]  133.35,45.47 0 bottom
LOGO38  SFE_LOGO_NAME.1_INCH  [SFE_LOGO_NAME_.1]  117.22,53.94 0 top
LOGO39  SFE_LOGO_NAME.1_INCH  [SFE_LOGO_NAME_.1]  129.16,53.94 0 bottom
LOGO40  OSHW-LOGOS  [OSHW-LOGO-S]  159.26,45.47 0 bottom
LOGO41  SFE_LOGO_NAME.1_INCH  [SFE_LOGO_NAME_.1]  143.13,53.94 0 top
LOGO42  SFE_LOGO_NAME.1_INCH  [SFE_LOGO_NAME_.1]  155.07,53.94 0 bottom
LOGO43  OSHW-LOGOS  [OSHW-LOGO-S]  185.17,45.47 0 bottom
LOGO44  SFE_LOGO_NAME.1_INCH  [SFE_LOGO_NAME_.1]  169.04,53.94 0 top
LOGO45  SFE_LOGO_NAME.1_INCH  [SFE_LOGO_NAME_.1]  180.97,53.94 0 bottom
LOGO46  OSHW-LOGOS  [OSHW-LOGO-S]  211.07,45.47 0 bottom
LOGO47  SFE_LOGO_NAME.1_INCH  [SFE_LOGO_NAME_.1]  194.94,53.94 0 top
LOGO48  SFE_LOGO_NAME.1_INCH  [SFE_LOGO_NAME_.1]  206.88,53.94 0 bottom
LOGO49  OSHW-LOGOS  [OSHW-LOGO-S]  29.72,71.37 0 bottom
LOGO50  SFE_LOGO_NAME.1_INCH  [SFE_LOGO_NAME_.1]  13.59,79.85 0 top
LOGO51  SFE_LOGO_NAME.1_INCH  [SFE_LOGO_NAME_.1]  25.53,79.85 0 bottom
LOGO52  OSHW-LOGOS  [OSHW-LOGO-S]  55.63,71.37 0 bottom
LOGO53  SFE_LOGO_NAME.1_INCH  [SFE_LOGO_NAME_.1]  39.5,79.85 0 top
LOGO54  SFE_LOGO_NAME.1_INCH  [SFE_LOGO_NAME_.1]  51.44,79.85 0 bottom
LOGO55  OSHW-LOGOS  [OSHW-LOGO-S]  81.53,71.37 0 bottom
LOGO56  SFE_LOGO_NAME.1_INCH  [SFE_LOGO_NAME_.1]  65.41,79.85 0 top
LOGO57  SFE_LOGO_NAME.1_INCH  [SFE_LOGO_NAME_.1]  77.34,79.85 0 bottom
LOGO58  OSHW-LOGOS  [OSHW-LOGO-S]  107.44,71.37 0 bottom
LOGO59  SFE_LOGO_NAME.1_INCH  [SFE_LOGO_NAME_.1]  91.31,79.85 0 top
LOGO60  SFE_LOGO_NAME.1_INCH  [SFE_LOGO_NAME_.1]  103.25,79.85 0 bottom
LOGO61  OSHW-LOGOS  [OSHW-LOGO-S]  133.35,71.37 0 bottom
LOGO62  SFE_LOGO_NAME.1_INCH  [SFE_LOGO_NAME_.1]  117.22,79.85 0 top
LOGO63  SFE_LOGO_NAME.1_INCH  [SFE_LOGO_NAME_.1]  129.16,79.85 0 bottom
LOGO64  OSHW-LOGOS  [OSHW-LOGO-S]  159.26,71.37 0 bottom
LOGO65  SFE_LOGO_NAME.1_INCH  [SFE_LOGO_NAME_.1]  143.13,79.85 0 top
LOGO66  SFE_LOGO_NAME.1_INCH  [SFE_LOGO_NAME_.1]  155.07,79.85 0 bottom
LOGO67  OSHW-LOGOS  [OSHW-LOGO-S]  185.17,71.37 0 bottom
LOGO68  SFE_LOGO_NAME.1_INCH  [SFE_LOGO_NAME_.1]  169.04,79.85 0 top
LOGO69  SFE_LOGO_NAME.1_INCH  [SFE_LOGO_NAME_.1]  180.97,79.85 0 bottom
LOGO70  OSHW-LOGOS  [OSHW-LOGO-S]  211.07,71.37 0 bottom
LOGO71  SFE_LOGO_NAME.1_INCH  [SFE_LOGO_NAME_.1]  194.94,79.85 0 top
LOGO72  SFE_LOGO_NAME.1_INCH  [SFE_LOGO_NAME_.1]  206.88,79.85 0 bottom
LOGO73  OSHW-LOGOS  [OSHW-LOGO-S]  29.72,97.28 0 bottom
LOGO74  SFE_LOGO_NAME.1_INCH  [SFE_LOGO_NAME_.1]  13.59,105.76 0 top
LOGO75  SFE_LOGO_NAME.1_INCH  [SFE_LOGO_NAME_.1]  25.53,105.76 0 bottom
LOGO76  OSHW-LOGOS  [OSHW-LOGO-S]  55.63,97.28 0 bottom
LOGO77  SFE_LOGO_NAME.1_INCH  [SFE_LOGO_NAME_.1]  39.5,105.76 0 top
LOGO78  SFE_LOGO_NAME.1_INCH  [SFE_LOGO_NAME_.1]  51.44,105.76 0 bottom
LOGO79  OSHW-LOGOS  [OSHW-LOGO-S]  81.53,97.28 0 bottom
LOGO80  SFE_LOGO_NAME.1_INCH  [SFE_LOGO_NAME_.1]  65.41,105.76 0 top
LOGO81  SFE_LOGO_NAME.1_INCH  [SFE_LOGO_NAME_.1]  77.34,105.76 0 bottom
LOGO82  OSHW-LOGOS  [OSHW-LOGO-S]  107.44,97.28 0 bottom
LOGO83  SFE_LOGO_NAME.1_INCH  [SFE_LOGO_NAME_.1]  91.31,105.76 0 top
LOGO84  SFE_LOGO_NAME.1_INCH  [SFE_LOGO_NAME_.1]  103.25,105.76 0 bottom
LOGO85  OSHW-LOGOS  [OSHW-LOGO-S]  133.35,97.28 0 bottom
LOGO86  SFE_LOGO_NAME.1_INCH  [SFE_LOGO_NAME_.1]  117.22,105.76 0 top
LOGO87  SFE_LOGO_NAME.1_INCH  [SFE_LOGO_NAME_.1]  129.16,105.76 0 bottom
LOGO88  OSHW-LOGOS  [OSHW-LOGO-S]  159.26,97.28 0 bottom
LOGO89  SFE_LOGO_NAME.1_INCH  [SFE_LOGO_NAME_.1]  143.13,105.76 0 top
LOGO90  SFE_LOGO_NAME.1_INCH  [SFE_LOGO_NAME_.1]  155.07,105.76 0 bottom
LOGO91  OSHW-LOGOS  [OSHW-LOGO-S]  185.17,97.28 0 bottom
LOGO92  SFE_LOGO_NAME.1_INCH  [SFE_LOGO_NAME_.1]  169.04,105.76 0 top
LOGO93  SFE_LOGO_NAME.1_INCH  [SFE_LOGO_NAME_.1]  180.97,105.76 0 bottom
LOGO94  OSHW-LOGOS  [OSHW-LOGO-S]  211.07,97.28 0 bottom
LOGO95  SFE_LOGO_NAME.1_INCH  [SFE_LOGO_NAME_.1]  194.94,105.76 0 top
LOGO96  SFE_LOGO_NAME.1_INCH  [SFE_LOGO_NAME_.1]  206.88,105.76 0 bottom
LOGO97  OSHW-LOGOS  [OSHW-LOGO-S]  29.72,123.19 0 bottom
LOGO98  SFE_LOGO_NAME.1_INCH  [SFE_LOGO_NAME_.1]  13.59,131.67 0 top
LOGO99  SFE_LOGO_NAME.1_INCH  [SFE_LOGO_NAME_.1]  25.53,131.67 0 bottom
LOGO100  OSHW-LOGOS  [OSHW-LOGO-S]  55.63,123.19 0 bottom
LOGO101  SFE_LOGO_NAME.1_INCH  [SFE_LOGO_NAME_.1]  39.5,131.67 0 top
LOGO102  SFE_LOGO_NAME.1_INCH  [SFE_LOGO_NAME_.1]  51.44,131.67 0 bottom
LOGO103  OSHW-LOGOS  [OSHW-LOGO-S]  81.53,123.19 0 bottom
LOGO104  SFE_LOGO_NAME.1_INCH  [SFE_LOGO_NAME_.1]  65.41,131.67 0 top
LOGO105  SFE_LOGO_NAME.1_INCH  [SFE_LOGO_NAME_.1]  77.34,131.67 0 bottom
LOGO106  OSHW-LOGOS  [OSHW-LOGO-S]  107.44,123.19 0 bottom
LOGO107  SFE_LOGO_NAME.1_INCH  [SFE_LOGO_NAME_.1]  91.31,131.67 0 top
LOGO108  SFE_LOGO_NAME.1_INCH  [SFE_LOGO_NAME_.1]  103.25,131.67 0 bottom
LOGO109  OSHW-LOGOS  [OSHW-LOGO-S]  133.35,123.19 0 bottom
LOGO110  SFE_LOGO_NAME.1_INCH  [SFE_LOGO_NAME_.1]  117.22,131.67 0 top
LOGO111  SFE_LOGO_NAME.1_INCH  [SFE_LOGO_NAME_.1]  129.16,131.67 0 bottom
LOGO112  OSHW-LOGOS  [OSHW-LOGO-S]  159.26,123.19 0 bottom
LOGO113  SFE_LOGO_NAME.1_INCH  [SFE_LOGO_NAME_.1]  143.13,131.67 0 top
LOGO114  SFE_LOGO_NAME.1_INCH  [SFE_LOGO_NAME_.1]  155.07,131.67 0 bottom
LOGO115  OSHW-LOGOS  [OSHW-LOGO-S]  185.17,123.19 0 bottom
LOGO116  SFE_LOGO_NAME.1_INCH  [SFE_LOGO_NAME_.1]  169.04,131.67 0 top
LOGO117  SFE_LOGO_NAME.1_INCH  [SFE_LOGO_NAME_.1]  180.97,131.67 0 bottom
LOGO118  OSHW-LOGOS  [OSHW-LOGO-S]  211.07,123.19 0 bottom
LOGO119  SFE_LOGO_NAME.1_INCH  [SFE_LOGO_NAME_.1]  194.94,131.67 0 top
LOGO120  SFE_LOGO_NAME.1_INCH  [SFE_LOGO_NAME_.1]  206.88,131.67 0 bottom
R1  4.7k  [0603]  39.12,23.37 180 top
R2  4.7k  [0603]  17.02,13.84 0 top
R3  100k  [0603]  23.37,23.37 180 top
R4  100k  [0603]  23.37,14.48 90 top
R5  4.7k  [0603]  39.12,15.75 180 top
R6  100k  [0603]  17.02,15.75 0 top
R7  100k  [0603]  42.93,15.75 0 top
R8  4.7k  [0603]  42.93,13.84 0 top
R9  100k  [0603]  49.28,23.37 180 top
R10  100k  [0603]  49.28,14.48 90 top
R11  4.7k  [0603]  65.02,23.37 180 top
R12  4.7k  [0603]  65.02,15.75 180 top
R13  4.7k  [0603]  13.21,23.37 180 top
R14  4.7k  [0603]  13.21,15.75 180 top
R15  100k  [0603]  68.83,15.75 0 top
R16  4.7k  [0603]  68.83,13.84 0 top
R17  100k  [0603]  75.18,23.37 180 top
R18  100k  [0603]  75.18,14.48 90 top
R19  4.7k  [0603]  90.93,23.37 180 top
R20  4.7k  [0603]  90.93,15.75 180 top
R21  100k  [0603]  94.74,15.75 0 top
R22  4.7k  [0603]  94.74,13.84 0 top
R23  100k  [0603]  101.09,23.37 180 top
R24  100k  [0603]  101.09,14.48 90 top
R25  4.7k  [0603]  116.84,23.37 180 top
R26  4.7k  [0603]  116.84,15.75 180 top
R27  100k  [0603]  120.65,15.75 0 top
R28  4.7k  [0603]  120.65,13.84 0 top
R29  100k  [0603]  127,23.37 180 top
R30  100k  [0603]  127,14.48 90 top
R31  4.7k  [0603]  142.75,23.37 180 top
R32  4.7k  [0603]  142.75,15.75 180 top
R33  100k  [0603]  146.56,15.75 0 top
R34  4.7k  [0603]  146.56,13.84 0 top
R35  100k  [0603]  152.91,23.37 180 top
R36  100k  [0603]  152.91,14.48 90 top
R37  4.7k  [0603]  168.66,23.37 180 top
R38  4.7k  [0603]  168.66,15.75 180 top
R39  100k  [0603]  172.47,15.75 0 top
R40  4.7k  [0603]  172.47,13.84 0 top
R41  100k  [0603]  178.82,23.37 180 top
R42  100k  [0603]  178.82,14.48 90 top
R43  4.7k  [0603]  194.56,23.37 180 top
R44  4.7k  [0603]  194.56,15.75 180 top
R45  100k  [0603]  198.37,15.75 0 top
R46  4.7k  [0603]  198.37,13.84 0 top
R47  100k  [0603]  204.72,23.37 180 top
R48  100k  [0603]  204.72,14.48 90 top
R49  4.7k  [0603]  13.21,49.28 180 top
R50  4.7k  [0603]  13.21,41.66 180 top
R51  100k  [0603]  17.02,41.66 0 top
R52  4.7k  [0603]  17.02,39.75 0 top
R53  100k  [0603]  23.37,49.28 180 top
R54  100k  [0603]  23.37,40.39 90 top
R55  4.7k  [0603]  39.12,49.28 180 top
R56  4.7k  [0603]  39.12,41.66 180 top
R57  100k  [0603]  42.93,41.66 0 top
R58  4.7k  [0603]  42.93,39.75 0 top
R59  100k  [0603]  49.28,49.28 180 top
R60  100k  [0603]  49.28,40.39 90 top
R61  4.7k  [0603]  65.02,49.28 180 top
R62  4.7k  [0603]  65.02,41.66 180 top
R63  100k  [0603]  68.83,41.66 0 top
R64  4.7k  [0603]  68.83,39.75 0 top
R65  100k  [0603]  75.18,49.28 180 top
R66  100k  [0603]  75.18,40.39 90 top
R67  4.7k  [0603]  90.93,49.28 180 top
R68  4.7k  [0603]  90.93,41.66 180 top
R69  100k  [0603]  94.74,41.66 0 top
R70  4.7k  [0603]  94.74,39.75 0 top
R71  100k  [0603]  101.09,49.28 180 top
R72  100k  [0603]  101.09,40.39 90 top
R73  4.7k  [0603]  116.84,49.28 180 top
R74  4.7k  [0603]  116.84,41.66 180 top
R75  100k  [0603]  120.65,41.66 0 top
R76  4.7k  [0603]  120.65,39.75 0 top
R77  100k  [0603]  127,49.28 180 top
R78  100k  [0603]  127,40.39 90 top
R79  4.7k  [0603]  142.75,49.28 180 top
R80  4.7k  [0603]  142.75,41.66 180 top
R81  100k  [0603]  146.56,41.66 0 top
R82  4.7k  [0603]  146.56,39.75 0 top
R83  100k  [0603]  152.91,49.28 180 top
R84  100k  [0603]  152.91,40.39 90 top
R85  4.7k  [0603]  168.66,49.28 180 top
R86  4.7k  [0603]  168.66,41.66 180 top
R87  100k  [0603]  172.47,41.66 0 top
R88  4.7k  [0603]  172.47,39.75 0 top
R89  100k  [0603]  178.82,49.28 180 top
R90  100k  [0603]  178.82,40.39 90 top
R91  4.7k  [0603]  194.56,49.28 180 top
R92  4.7k  [0603]  194.56,41.66 180 top
R93  100k  [0603]  198.37,41.66 0 top
R94  4.7k  [0603]  198.37,39.75 0 top
R95  100k  [0603]  204.72,49.28 180 top
R96  100k  [0603]  204.72,40.39 90 top
R97  4.7k  [0603]  13.21,75.18 180 top
R98  4.7k  [0603]  13.21,67.56 180 top
R99  100k  [0603]  17.02,67.56 0 top
R100  4.7k  [0603]  17.02,65.66 0 top
R101  100k  [0603]  23.37,75.18 180 top
R102  100k  [0603]  23.37,66.29 90 top
R103  4.7k  [0603]  39.12,75.18 180 top
R104  4.7k  [0603]  39.12,67.56 180 top
R105  100k  [0603]  42.93,67.56 0 top
R106  4.7k  [0603]  42.93,65.66 0 top
R107  100k  [0603]  49.28,75.18 180 top
R108  100k  [0603]  49.28,66.29 90 top
R109  4.7k  [0603]  65.02,75.18 180 top
R110  4.7k  [0603]  65.02,67.56 180 top
R111  100k  [0603]  68.83,67.56 0 top
R112  4.7k  [0603]  68.83,65.66 0 top
R113  100k  [0603]  75.18,75.18 180 top
R114  100k  [0603]  75.18,66.29 90 top
R115  4.7k  [0603]  90.93,75.18 180 top
R116  4.7k  [0603]  90.93,67.56 180 top
R117  100k  [0603]  94.74,67.56 0 top
R118  4.7k  [0603]  94.74,65.66 0 top
R119  100k  [0603]  101.09,75.18 180 top
R120  100k  [0603]  101.09,66.29 90 top
R121  4.7k  [0603]  116.84,75.18 180 top
R122  4.7k  [0603]  116.84,67.56 180 top
R123  100k  [0603]  120.65,67.56 0 top
R124  4.7k  [0603]  120.65,65.66 0 top
R125  100k  [0603]  127,75.18 180 top
R126  100k  [0603]  127,66.29 90 top
R127  4.7k  [0603]  142.75,75.18 180 top
R128  4.7k  [0603]  142.75,67.56 180 top
R129  100k  [0603]  146.56,67.56 0 top
R130  4.7k  [0603]  146.56,65.66 0 top
R131  100k  [0603]  152.91,75.18 180 top
R132  100k  [0603]  152.91,66.29 90 top
R133  4.7k  [0603]  168.66,75.18 180 top
R134  4.7k  [0603]  168.66,67.56 180 top
R135  100k  [0603]  172.47,67.56 0 top
R136  4.7k  [0603]  172.47,65.66 0 top
R137  100k  [0603]  178.82,75.18 180 top
R138  100k  [0603]  178.82,66.29 90 top
R139  4.7k  [0603]  194.56,75.18 180 top
R140  4.7k  [0603]  194.56,67.56 180 top
R141  100k  [0603]  198.37,67.56 0 top
R142  4.7k  [0603]  198.37,65.66 0 top
R143  100k  [0603]  204.72,75.18 180 top
R144  100k  [0603]  204.72,66.29 90 top
R145  4.7k  [0603]  13.21,101.09 180 top
R146  4.7k  [0603]  13.21,93.47 180 top
R147  100k  [0603]  17.02,93.47 0 top
R148  4.7k  [0603]  17.02,91.57 0 top
R149  100k  [0603]  23.37,101.09 180 top
R150  100k  [0603]  23.37,92.2 90 top
R151  4.7k  [0603]  39.12,101.09 180 top
R152  4.7k  [0603]  39.12,93.47 180 top
R153  100k  [0603]  42.93,93.47 0 top
R154  4.7k  [0603]  42.93,91.57 0 top
R155  100k  [0603]  49.28,101.09 180 top
R156  100k  [0603]  49.28,92.2 90 top
R157  4.7k  [0603]  65.02,101.09 180 top
R158  4.7k  [0603]  65.02,93.47 180 top
R159  100k  [0603]  68.83,93.47 0 top
R160  4.7k  [0603]  68.83,91.57 0 top
R161  100k  [0603]  75.18,101.09 180 top
R162  100k  [0603]  75.18,92.2 90 top
R163  4.7k  [0603]  90.93,101.09 180 top
R164  4.7k  [0603]  90.93,93.47 180 top
R165  100k  [0603]  94.74,93.47 0 top
R166  4.7k  [0603]  94.74,91.57 0 top
R167  100k  [0603]  101.09,101.09 180 top
R168  100k  [0603]  101.09,92.2 90 top
R169  4.7k  [0603]  116.84,101.09 180 top
R170  4.7k  [0603]  116.84,93.47 180 top
R171  100k  [0603]  120.65,93.47 0 top
R172  4.7k  [0603]  120.65,91.57 0 top
R173  100k  [0603]  127,101.09 180 top
R174  100k  [0603]  127,92.2 90 top
R175  4.7k  [0603]  142.75,101.09 180 top
R176  4.7k  [0603]  142.75,93.47 180 top
R177  100k  [0603]  146.56,93.47 0 top
R178  4.7k  [0603]  146.56,91.57 0 top
R179  100k  [0603]  152.91,101.09 180 top
R180  100k  [0603]  152.91,92.2 90 top
R181  4.7k  [0603]  168.66,101.09 180 top
R182  4.7k  [0603]  168.66,93.47 180 top
R183  100k  [0603]  172.47,93.47 0 top
R184  4.7k  [0603]  172.47,91.57 0 top
R185  100k  [0603]  178.82,101.09 180 top
R186  100k  [0603]  178.82,92.2 90 top
R187  4.7k  [0603]  194.56,101.09 180 top
R188  4.7k  [0603]  194.56,93.47 180 top
R189  100k  [0603]  198.37,93.47 0 top
R190  4.7k  [0603]  198.37,91.57 0 top
R191  100k  [0603]  204.72,101.09 180 top
R192  100k  [0603]  204.72,92.2 90 top
R193  4.7k  [0603]  13.21,127 180 top
R194  4.7k  [0603]  13.21,119.38 180 top
R195  100k  [0603]  17.02,119.38 0 top
R196  4.7k  [0603]  17.02,117.47 0 top
R197  100k  [0603]  23.37,127 180 top
R198  100k  [0603]  23.37,118.11 90 top
R199  4.7k  [0603]  39.12,127 180 top
R200  4.7k  [0603]  39.12,119.38 180 top
R201  100k  [0603]  42.93,119.38 0 top
R202  4.7k  [0603]  42.93,117.47 0 top
R203  100k  [0603]  49.28,127 180 top
R204  100k  [0603]  49.28,118.11 90 top
R205  4.7k  [0603]  65.02,127 180 top
R206  4.7k  [0603]  65.02,119.38 180 top
R207  100k  [0603]  68.83,119.38 0 top
R208  4.7k  [0603]  68.83,117.47 0 top
R209  100k  [0603]  75.18,127 180 top
R210  100k  [0603]  75.18,118.11 90 top
R211  4.7k  [0603]  90.93,127 180 top
R212  4.7k  [0603]  90.93,119.38 180 top
R213  100k  [0603]  94.74,119.38 0 top
R214  4.7k  [0603]  94.74,117.47 0 top
R215  100k  [0603]  101.09,127 180 top
R216  100k  [0603]  101.09,118.11 90 top